# Altium PCB PCB1.PcbDoc
Units mil, origin at the board's own origin, x right, y up, seen from the top; angles counter-clockwise.
Board outline 6000 x 4000 mil, 2 copper layers (Top Layer, Bottom Layer); 94 components, 117 nets, 713 pads, 0 vias.
Unrouted connection lines stored in the file: 350.
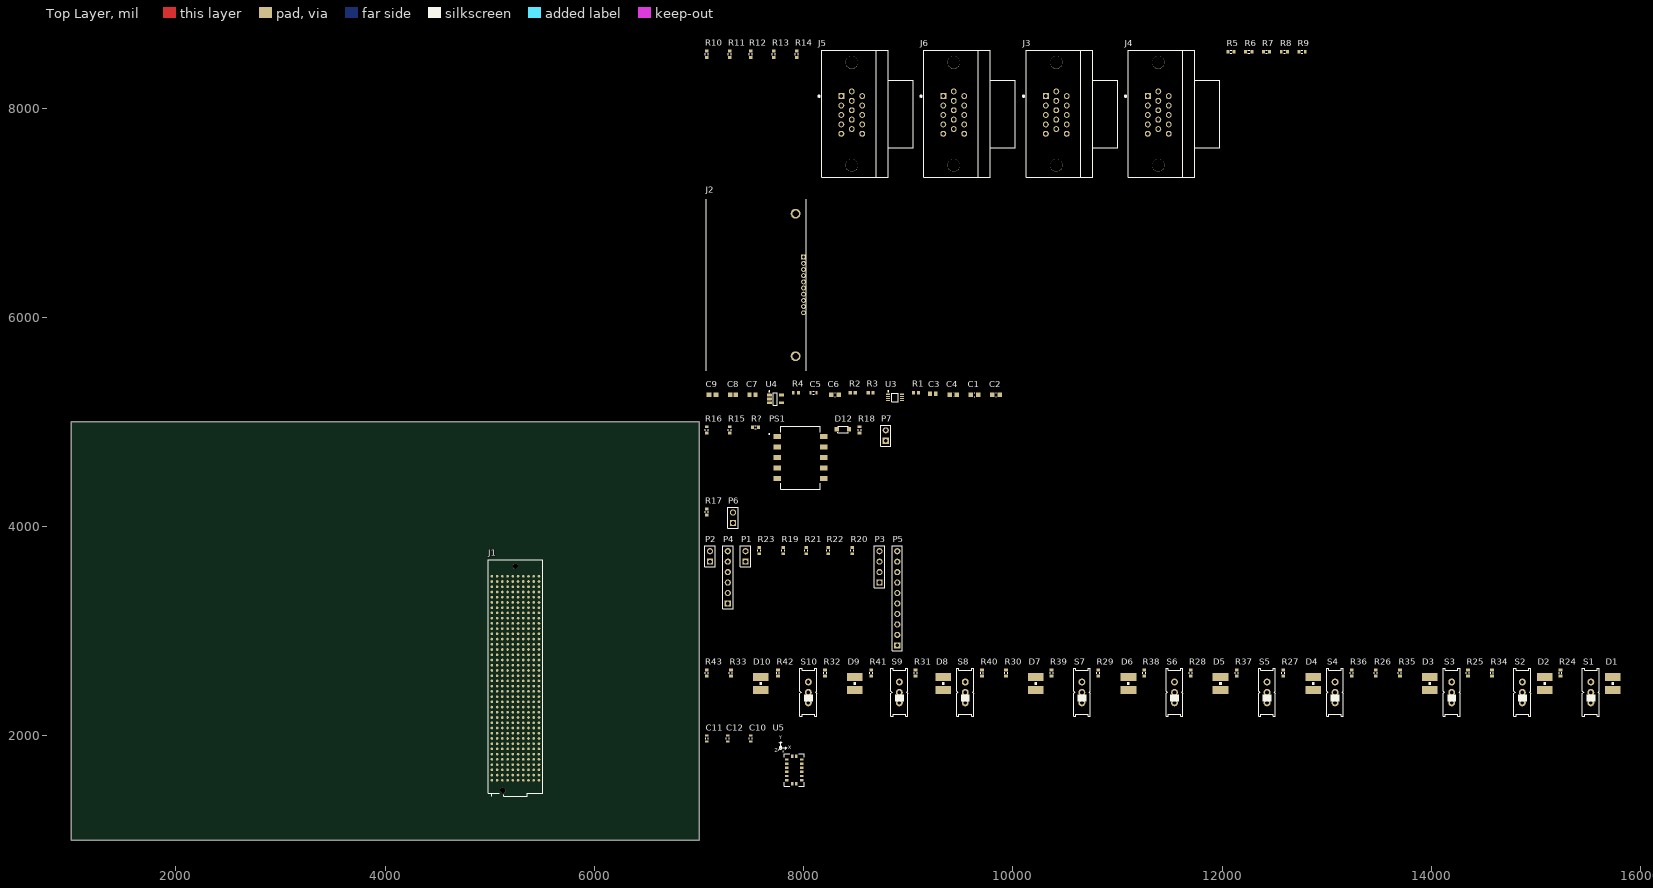
[diagram p0: Top Layer view]
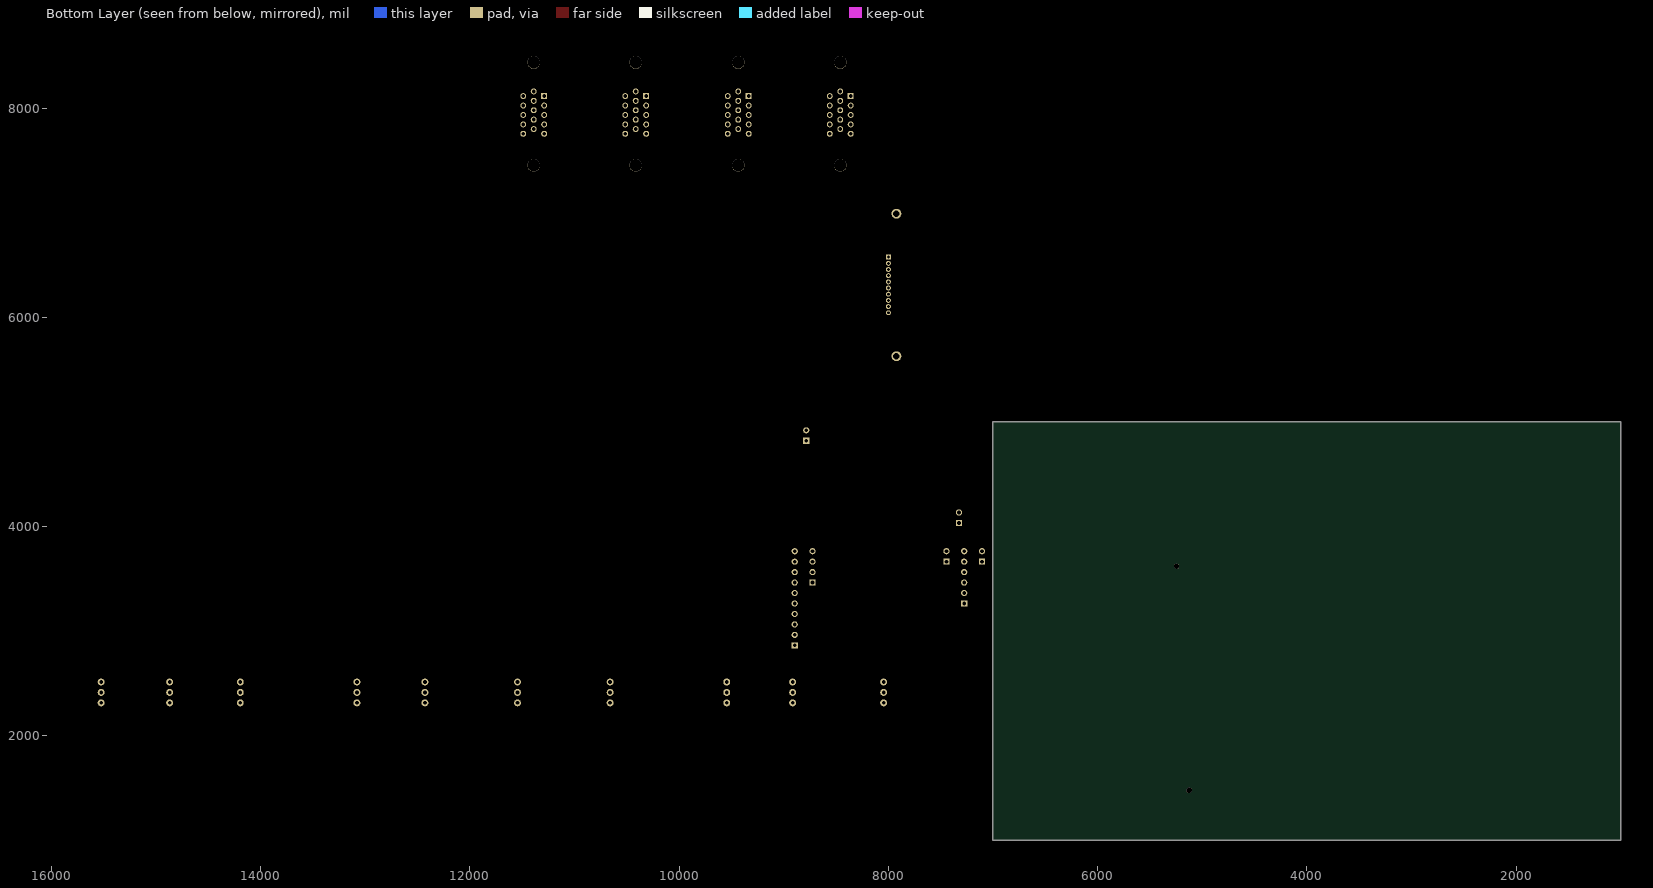
[diagram p1: Bottom Layer view, seen from below]

## Layer stack, top to bottom
Top Solder: solder mask 0.4, Solder Resist, Dk 3.5
Top Layer: signal copper 1.4
Dielectric 1: dielectric 12.6, FR-4, Dk 4.8
Bottom Layer: signal copper 1.4
Bottom Solder: solder mask 0.4, Solder Resist, Dk 3.5

## Board outline
1000,1000 7000,1000 7000,5000 1000,5000

## Design rules (kind name [scope] priority, off if disabled: settings)
Clearance [All] p1: gap=10 ignorepadtopadclearanceinfootprint=FALSE except(0: Arc-Hole Track-Hole SMDPad-Hole THPad-Hole Via-Hole Fill-Hole Poly-Hole Region-Hole Text-Hole)
PolygonConnect [All] p1: connectstyle=Relief reliefconductorwidth=10 reliefentries=4 polygonreliefangle="90 Angle" airgapwidth=10
RoutingVias [All] p1: holewidth=28 width=50 viastyle="Through Hole" minholewidth=28 minwidth=50 maxholewidth=28 maxwidth=50
SolderMaskExpansion [All] p1: expansion=4 istentingtop=FALSE
Width [All] p1: maxlimit=10 minlimit=10 preferedwidth=10
30 further rules are at their usual default settings.

## Components (designator, comment, footprint, x,y, rotation, side; value= is the part's Value field where it differs from the comment)
C1 "100nF 50V" CAPC0603(1608)100_M 9635,5260 r0 top value=100nF
C2 "100nF 50V" CAPC0603(1608)100_M 9840,5260 r0 top value=100nF
C3 "4.7uF" CAPC1608X87X35NL15T15 9235,5270 r0 top
C4 "100nF 50V" CAPC0603(1608)100_M 9430,5260 r0 top value=100nF
C5 "C1608X5R1A106K080AC" CAPC1608X90X20LL10 8095,5280 r0 top
C6 "100nF 50V" CAPC0603(1608)100_M 8300,5260 r0 top value=100nF
C7 "2.2uF 10V" CAPC1608X90X35ML10T15 7510,5260 r0 top
C8 "10nF 50V" CAPC1608X90X40ML10T20 7325,5260 r0 top
C9 "1uF 10V" CAPC1608X90X35ML15T15 7130,5260 r0 top
C10 "C1608X5R1A106K080AC" CAPC1608X90X20LL10 7495,1975 r90 top
C11 "C1608X5R1A106K080AC" CAPC1608X90X20LL10 7075,1975 r90 top
C12 "C1608X5R1A106K080AC" CAPC1608X90X20LL10 7275,1975 r90 top
D1 "LP T67F-P1R2-35-1-20-R18-Z" "LP T67F-P1R2-35-1-20-R18-Z" 15735,2500 r0 top
D2 "LP T67F-P1R2-35-1-20-R18-Z" "LP T67F-P1R2-35-1-20-R18-Z" 15085,2500 r0 top
D3 "LP T67F-P1R2-35-1-20-R18-Z" "LP T67F-P1R2-35-1-20-R18-Z" 13985,2500 r0 top
D4 "LP T67F-P1R2-35-1-20-R18-Z" "LP T67F-P1R2-35-1-20-R18-Z" 12870,2500 r0 top
D5 "LP T67F-P1R2-35-1-20-R18-Z" "LP T67F-P1R2-35-1-20-R18-Z" 11985,2500 r0 top
D6 "LP T67F-P1R2-35-1-20-R18-Z" "LP T67F-P1R2-35-1-20-R18-Z" 11105,2500 r0 top
D7 "LP T67F-P1R2-35-1-20-R18-Z" "LP T67F-P1R2-35-1-20-R18-Z" 10220,2500 r0 top
D8 "LP T67F-P1R2-35-1-20-R18-Z" "LP T67F-P1R2-35-1-20-R18-Z" 9335,2500 r0 top
D9 "LP T67F-P1R2-35-1-20-R18-Z" "LP T67F-P1R2-35-1-20-R18-Z" 8490,2500 r0 top
D10 "LP T67F-P1R2-35-1-20-R18-Z" "LP T67F-P1R2-35-1-20-R18-Z" 7590,2500 r0 top
D12 "RB161M-20TR" *SODFL260X160X90L70X90N 8375,4930 r0 top
J1 "ASP-134486-01" SAMTEC_ASP-134486-01_ASP-134486-01(Primary) 5245,2550 r90 top
J2 "NHD-C0216CZ-FSW-FBW-3V3" *LCD_NHD-C0216CZ-FSW-FBW-3V3_NHD-C0216CZ-FSW-FBW-3V3(Primary) 8000,6310 r90 top
J3 "181-015-213R561" *NORCOMP_181-015-213R561 10415,7945 r90 top
J4 "181-015-213R561" *NORCOMP_181-015-213R561 11390,7945 r90 top
J5 "181-015-213R561" *NORCOMP_181-015-213R561 8460,7945 r90 top
J6 "181-015-213R561" *NORCOMP_181-015-213R561 9435,7945 r90 top
P1 "I2C_headers" HDR1X2 7445,3665 r90 top
P2 "I2C_headers" HDR1X2 7105,3665 r90 top
P3 "SPI_headers" HDR1X4 8725,3465 r90 top
P4 "UART" HDR1X6 7275,3265 r90 top
P5 "GPIO_headers" HDR1X10 8895,2865 r90 top
P6 "12v_Ref" HDR1X2 7325,4035 r90 top
P7 "5v_ref" HDR1X2 8785,4820 r90 top
PS1 "R-78AA5.0-1.0SMD-R" *CONV_R-78AA5.0-1.0SMD-R 7970,4660 r0 top
R1 "200k" RESC1608X55X30LL15T15 9075,5280 r0 top
R2 "1k" RESC1608X55X30LL20T20 8470,5280 r0 top
R3 "1k" RESC1608X55X30LL20T20 8640,5280 r0 top
R4 "4.7k" RESC1608X55X30LL15T15 7925,5280 r0 top
R5 "Res3" J1-0603 12085,8540 r0 top value=10K
R6 "Res3" J1-0603 12255,8540 r0 top value=10K
R7 "Res3" J1-0603 12425,8540 r0 top value=10K
R8 "Res3" J1-0603 12595,8540 r0 top value=10K
R9 "Res3" J1-0603 12765,8540 r0 top value=10K
R10 "Res3" J1-0603 7075,8515 r90 top value=10K
R11 "Res3" J1-0603 7295,8515 r90 top value=10K
R12 "Res3" J1-0603 7495,8515 r90 top value=10K
R13 "Res3" J1-0603 7715,8515 r90 top value=10K
R14 "Res3" J1-0603 7935,8515 r90 top value=10K
R15 "Res3" J1-0603 7295,4925 r90 top value=46.7K
R16 "Res3" J1-0603 7075,4925 r90 top value=0
R17 "Res3" J1-0603 7075,4140 r90 top value=46.7K
R18 "Res3" J1-0603 8535,4925 r90 top value=1M
R19 "Res3" J1-0603 7805,3770 r90 top value=10K
R20 "Res3" J1-0603 8465,3770 r90 top value=10K
R21 "Res3" J1-0603 8025,3770 r90 top value=10K
R22 "Res3" J1-0603 8235,3770 r90 top value=10K
R23 "Res3" J1-0603 7575,3770 r90 top value=10K
R24 "Res3" J1-0603 15235,2600 r90 top value=220
R25 "Res3" J1-0603 14350,2600 r90 top value=220
R26 "Res3" J1-0603 13470,2600 r90 top value=220
R27 "Res3" J1-0603 12585,2600 r90 top value=220
R28 "Res3" J1-0603 11700,2600 r90 top value=220
R29 "Res3" J1-0603 10815,2600 r90 top value=220
R30 "Res3" J1-0603 9935,2600 r90 top value=220
R31 "Res3" J1-0603 9070,2600 r90 top value=220
R32 "Res3" J1-0603 8205,2600 r90 top value=220
R33 "Res3" J1-0603 7305,2600 r90 top value=220
R34 "Res3" J1-0603 14580,2600 r90 top value=10K
R35 "Res3" J1-0603 13700,2600 r90 top value=10K
R36 "Res3" J1-0603 13240,2600 r90 top value=10K
R37 "Res3" J1-0603 12140,2600 r90 top value=10K
R38 "Res3" J1-0603 11255,2600 r90 top value=10K
R39 "Res3" J1-0603 10370,2600 r90 top value=10K
R40 "Res3" J1-0603 9705,2600 r90 top value=10K
R41 "Res3" J1-0603 8645,2600 r90 top value=10K
R42 "Res3" J1-0603 7755,2600 r90 top value=10K
R43 "Res3" J1-0603 7075,2600 r90 top value=10K
R? "Res3" J1-0603 7540,4950 r0 top value=10k
S1 "EG1218" *EG1218_EG1218(Primary) 15525,2415 r90 top
S2 "EG1218" *EG1218_EG1218(Primary) 14870,2415 r90 top
S3 "EG1218" *EG1218_EG1218(Primary) 14195,2415 r90 top
S4 "EG1218" *EG1218_EG1218(Primary) 13080,2415 r90 top
S5 "EG1218" *EG1218_EG1218(Primary) 12430,2415 r90 top
S6 "EG1218" *EG1218_EG1218(Primary) 11545,2415 r90 top
S7 "EG1218" *EG1218_EG1218(Primary) 10660,2415 r90 top
S8 "EG1218" *EG1218_EG1218(Primary) 9545,2415 r90 top
S9 "EG1218" *EG1218_EG1218(Primary) 8915,2415 r90 top
S10 "EG1218" *EG1218_EG1218(Primary) 8045,2415 r90 top
U3 "PCA9306DCUR" DCU0008A_M 8875,5235 r0 top
U4 "LP2985-18DBVR" DBV0005A_M 7730,5220 r0 top
U5 "LIS3LV02DLTR" LGA-16_4P4X7P5X1 7910,1675 r0 top

## Footprints (in the part's own frame and the unit in brackets; to place one, negate y for a bottom-side part, rotate by r counter-clockwise, add the part's x,y. Pads: shape width x height; smd on the part's side, far side on the other; paste and mask are expansions set on the pad)
*CONV_R-78AA5.0-1.0SMD-R [mm]
  rect 1.8x1.2 smd: 1(-5.6,5.08) 2(-5.6,2.54) 3(-5.6,0) 4(-5.6,-2.54) 5(-5.6,-5.08) 6(5.6,-5.08) 7(5.6,-2.54) 8(5.6,0) 9(5.6,2.54) 10(5.6,5.08)
  silkscreen extent -7.72,-7.68 4.8,7.62
*EG1218_EG1218(Primary) [mil]
  round 66 hole 35.43: O(-100,0) P(0,0) S(100,0)
  silkscreen extent -230,-80 230,80
*LCD_NHD-C0216CZ-FSW-FBW-3V3_NHD-C0216CZ-FSW-FBW-3V3(Primary) [mm]
  rect 1.208x1.208 hole 0.7: 1(6.75,0)
  round 1.208 hole 0.7: 2(5.25,0) 3(3.75,0) 4(2.25,0) 5(0.75,0) 6(-0.75,0) 7(-2.25,0) 8(-3.75,0) 9(-5.25,0) 10(-6.75,0)
  round 2.4 hole 1.6: A(-17.3,1.95) K(17.3,1.95)
  silkscreen extent -20.85,-0.6 20.85,23.7, body extent -20.7,-0.71 20.7,23.59, height 4.1
*NORCOMP_181-015-213R561 [mil]
  rect 57x57 hole 37: 1(170,100)
  round 57 hole 37: 2(80,100) 3(-10,100) 4(-100,100) 5(-190,100) 6(215,0) 7(125,0) 8(35,0) 9(-55,0) 10(-145,0) 11(170,-100) 12(80,-100) 13(-10,-100) 14(-100,-100) 15(-190,-100)
  round 120 hole 120 unplated: None(-492,0) None(492,0)
  silkscreen extent -606,-587 606,321
*SODFL260X160X90L70X90N [mm]
  rect 1.07x1.03 smd: 1(-1.485,0) 2(1.485,0)
  silkscreen extent -1.3,-0.8 1.3,0.8
CAPC0603(1608)100_M [mm] "Chip Capacitor, Body 1.6x0.8mm, Height 1.0mm, IPC Low Density"
  rect 1.1x1.1 smd: 1(-0.9,0) 2(0.9,0)
  silkscreen extent -0.05,-0.45 0.05,0.45, body extent -0.87,-0.47 0.88,0.48, height 1
CAPC1608X87X35NL15T15 [mm] "Chip Capacitor, 2-Leads, Body 1.60x0.80mm, IPC Medium Density"
  rect 0.9x1 smd: 1(-0.675,0) 2(0.675,0)
  body extent -0.87,-0.48 0.87,0.47, height 0.87
CAPC1608X90X20LL10 [mm]
  rect 0.45x0.85 smd: 1(-0.75,0) 2(0.75,0)
  silkscreen extent -0.15,-0.33 0.15,0.33, body extent -0.85,-0.45 0.85,0.45, height 0.9
CAPC1608X90X35ML10T15 [mm] "Chip Capacitor, 2-Leads, Body 1.60x0.80mm, IPC Low Density"
  rect 0.95x1.05 smd: 1(-0.725,0) 2(0.725,0)
  body extent -0.85,-0.45 0.85,0.45, height 0.9
CAPC1608X90X35ML15T15 [mm] "Chip Capacitor, 2-Leads, Body 1.60x0.81mm, IPC Low Density"
  rect 1.25x1.1 smd: 1(-0.85,0) 2(0.85,0)
  body extent -0.88,-0.48 0.87,0.48, height 0.9
CAPC1608X90X40ML10T20 [mm] "Chip Capacitor, 2-Leads, Body 1.7x0.9mm, IPC Low Density"
  rect 1.05x1.05 smd: 1(-0.675,0) 2(0.675,0)
  body extent -0.85,-0.45 0.85,0.45, height 0.9
DBV0005A_M [mm] "SOT23, 5-Leads, Body 3.05x1.75mm, Pitch 0.95mm, IPC Low Density"
  rrect15% 1.2x0.65 smd: 1(-1.475,0.95) 2(-1.475,0) 3(-1.475,-0.95) 4(1.475,-0.95) 5(1.475,0.95)
  silkscreen extent -1.6,-1.55 0.5,1.95, body extent -1.42,-1.46 1.42,1.46, height 1.08
DCU0008A_M [mm] "SOP, 8-Leads, Body 2.4x2.1mm, Pitch 0.5mm, IPC Low Density"
  rrect33% 1x0.3 smd: 1(-1.7,0.75) 2(-1.7,0.25) 3(-1.7,-0.25) 4(-1.7,-0.75) 5(1.7,-0.75) 6(1.7,-0.25) 7(1.7,0.25) 8(1.7,0.75)
  silkscreen extent -1.82,-1.05 0.8,1.6, body extent -1.56,-1 1.56,1, height 0.9
HDR1X2 [mm] "Connector; Header; 2 Position"
  rect 1.5x1.5 hole 0.9: 1(0,0)
  round 1.5 hole 0.9: 2(2.54,0)
  silkscreen extent -1.27,-1.27 3.81,1.27
HDR1X4 [mm] "Connector; Header; 4 Position"
  rect 1.5x1.5 hole 0.9: 1(0,0)
  round 1.5 hole 0.9: 2(2.54,0) 3(5.08,0) 4(7.62,0)
  silkscreen extent -1.27,-1.27 8.89,1.27
HDR1X6 [mm] "Connector; Header; 6 Position"
  rect 1.5x1.5 hole 0.9: 1(0,0)
  round 1.5 hole 0.9: 2(2.54,0) 3(5.08,0) 4(7.62,0) 5(10.16,0) 6(12.7,0)
  silkscreen extent -1.27,-1.27 13.97,1.27
HDR1X10 [mm] "Connector; Header; 10 Position"
  rect 1.5x1.5 hole 0.9: 1(0,0)
  round 1.5 hole 0.9: 2(2.54,0) 3(5.08,0) 4(7.62,0) 5(10.16,0) 6(12.7,0) 7(15.24,0) 8(17.78,0) 9(20.32,0) 10(22.86,0)
  silkscreen extent -1.27,-1.27 24.13,1.27
J1-0603 [mm] "Chip Resistor, Body 1.6x0.8mm, IPC High Density"
  rect 0.7x0.9 smd: 1(-0.75,0) 2(0.75,0)
  silkscreen extent -0.2,-0.35 0.2,0.35, body extent -0.85,-0.48 0.85,0.48, height 0.9
LGA-16_4P4X7P5X1 [mil]
  rect 34x22 smd: 1(-70.5,98.43) 2(-70.5,59.06) 3(-70.5,19.68) 4(-70.5,-19.68) 5(-70.5,-59.06) 6(-70.5,-98.43) 9(70.5,-98.43) 10(70.5,-59.06) 11(70.5,-19.68) 12(70.5,19.68) 13(70.5,59.06) 14(70.5,98.43)
  rect 22x34 smd: 7(-19.69,-131.5) 8(19.69,-131.5) 15(19.69,131.5) 16(-19.69,131.5)
  silkscreen extent -154,-156 94,304, body extent -89,-151 89,151, height 39
"LP T67F-P1R2-35-1-20-R18-Z" [mil]
  rect 150x76 smd: A(0,63) K(0,-63)
  silkscreen extent -10,-10 10,10
RESC1608X55X30LL15T15 [mm] "Chip Resistor, 2-Leads, Body 1.60x0.80mm, IPC High Density"
  rect 0.7x0.85 smd: 1(-0.625,0) 2(0.625,0)
  body extent -0.87,-0.48 0.87,0.48, height 0.55
RESC1608X55X30LL20T20 [mm] "Chip Resistor, 2-Leads, Body 1.60x0.80mm, IPC High Density"
  rect 0.8x0.9 smd: 1(-0.6,0) 2(0.6,0)
  body extent -0.9,-0.5 0.9,0.5, height 0.55
SAMTEC_ASP-134486-01_ASP-134486-01(Primary) [mm]
  round 0.64 smd: A1(-24.765,5.715) A2(-23.495,5.715) A3(-22.225,5.715) A4(-20.955,5.715) A5(-19.685,5.715) A6(-18.415,5.715) A7(-17.145,5.715) A8(-15.875,5.715) A9(-14.605,5.715) A10(-13.335,5.715) A11(-12.065,5.715) A12(-10.795,5.715) A13(-9.525,5.715) A14(-8.255,5.715) A15(-6.985,5.715) A16(-5.715,5.715) A17(-4.445,5.715) A18(-3.175,5.715) A19(-1.905,5.715) A20(-0.635,5.715) A21(0.635,5.715) A22(1.905,5.715) A23(3.175,5.715) A24(4.445,5.715) A25(5.715,5.715) A26(6.985,5.715) A27(8.255,5.715) A28(9.525,5.715) A29(10.795,5.715) A30(12.065,5.715) A31(13.335,5.715) A32(14.605,5.715) A33(15.875,5.715) A34(17.145,5.715) A35(18.415,5.715) A36(19.685,5.715) A37(20.955,5.715) A38(22.225,5.715) A39(23.495,5.715) A40(24.765,5.715) B1(-24.765,4.445) B2(-23.495,4.445) B3(-22.225,4.445) B4(-20.955,4.445) B5(-19.685,4.445) B6(-18.415,4.445) B7(-17.145,4.445) B8(-15.875,4.445) B9(-14.605,4.445) B10(-13.335,4.445) B11(-12.065,4.445) B12(-10.795,4.445) B13(-9.525,4.445) B14(-8.255,4.445) B15(-6.985,4.445) B16(-5.715,4.445) B17(-4.445,4.445) B18(-3.175,4.445) B19(-1.905,4.445) B20(-0.635,4.445) B21(0.635,4.445) B22(1.905,4.445) B23(3.175,4.445) B24(4.445,4.445) B25(5.715,4.445) B26(6.985,4.445) B27(8.255,4.445) B28(9.525,4.445) B29(10.795,4.445) B30(12.065,4.445) B31(13.335,4.445) B32(14.605,4.445) B33(15.875,4.445) B34(17.145,4.445) B35(18.415,4.445) B36(19.685,4.445) B37(20.955,4.445) B38(22.225,4.445) B39(23.495,4.445) B40(24.765,4.445) C1(-24.765,3.175) C2(-23.495,3.175) C3(-22.225,3.175) C4(-20.955,3.175) C5(-19.685,3.175) C6(-18.415,3.175) C7(-17.145,3.175) C8(-15.875,3.175) C9(-14.605,3.175) C10(-13.335,3.175) C11(-12.065,3.175) C12(-10.795,3.175) C13(-9.525,3.175) C14(-8.255,3.175) C15(-6.985,3.175) C16(-5.715,3.175) C17(-4.445,3.175) C18(-3.175,3.175) C19(-1.905,3.175) C20(-0.635,3.175) C21(0.635,3.175) C22(1.905,3.175) C23(3.175,3.175) C24(4.445,3.175) C25(5.715,3.175) C26(6.985,3.175) C27(8.255,3.175) C28(9.525,3.175) C29(10.795,3.175) C30(12.065,3.175) C31(13.335,3.175) C32(14.605,3.175) C33(15.875,3.175) C34(17.145,3.175) C35(18.415,3.175) C36(19.685,3.175) C37(20.955,3.175) C38(22.225,3.175) C39(23.495,3.175) C40(24.765,3.175) D1(-24.765,1.905) D2(-23.495,1.905) D3(-22.225,1.905) D4(-20.955,1.905) D5(-19.685,1.905) D6(-18.415,1.905) D7(-17.145,1.905) D8(-15.875,1.905) D9(-14.605,1.905) D10(-13.335,1.905) D11(-12.065,1.905) D12(-10.795,1.905) D13(-9.525,1.905) D14(-8.255,1.905) D15(-6.985,1.905) D16(-5.715,1.905) D17(-4.445,1.905) D18(-3.175,1.905) D19(-1.905,1.905) D20(-0.635,1.905) D21(0.635,1.905) D22(1.905,1.905) D23(3.175,1.905) D24(4.445,1.905) D25(5.715,1.905) D26(6.985,1.905) D27(8.255,1.905) D28(9.525,1.905) D29(10.795,1.905) D30(12.065,1.905) D31(13.335,1.905) D32(14.605,1.905) D33(15.875,1.905) D34(17.145,1.905) D35(18.415,1.905) D36(19.685,1.905) D37(20.955,1.905) D38(22.225,1.905) D39(23.495,1.905) D40(24.765,1.905) E1(-24.765,0.635) E2(-23.495,0.635) E3(-22.225,0.635) E4(-20.955,0.635) E5(-19.685,0.635) E6(-18.415,0.635) E7(-17.145,0.635) E8(-15.875,0.635) E9(-14.605,0.635) E10(-13.335,0.635) E11(-12.065,0.635) E12(-10.795,0.635) E13(-9.525,0.635) E14(-8.255,0.635) E15(-6.985,0.635) E16(-5.715,0.635) E17(-4.445,0.635) E18(-3.175,0.635) E19(-1.905,0.635) E20(-0.635,0.635) E21(0.635,0.635) E22(1.905,0.635) E23(3.175,0.635) E24(4.445,0.635) E25(5.715,0.635) E26(6.985,0.635) E27(8.255,0.635) E28(9.525,0.635) E29(10.795,0.635) E30(12.065,0.635) E31(13.335,0.635) E32(14.605,0.635) E33(15.875,0.635) E34(17.145,0.635) E35(18.415,0.635) E36(19.685,0.635) E37(20.955,0.635) E38(22.225,0.635) E39(23.495,0.635) E40(24.765,0.635) F1(-24.765,-0.635) F2(-23.495,-0.635) F3(-22.225,-0.635) F4(-20.955,-0.635) F5(-19.685,-0.635) F6(-18.415,-0.635) F7(-17.145,-0.635) F8(-15.875,-0.635) F9(-14.605,-0.635) F10(-13.335,-0.635) F11(-12.065,-0.635) F12(-10.795,-0.635) F13(-9.525,-0.635) F14(-8.255,-0.635) F15(-6.985,-0.635) F16(-5.715,-0.635) F17(-4.445,-0.635) F18(-3.175,-0.635) F19(-1.905,-0.635) F20(-0.635,-0.635) F21(0.635,-0.635) F22(1.905,-0.635) F23(3.175,-0.635) F24(4.445,-0.635) F25(5.715,-0.635) F26(6.985,-0.635) F27(8.255,-0.635) F28(9.525,-0.635) F29(10.795,-0.635) F30(12.065,-0.635) F31(13.335,-0.635) F32(14.605,-0.635) F33(15.875,-0.635) F34(17.145,-0.635) F35(18.415,-0.635) F36(19.685,-0.635) F37(20.955,-0.635) F38(22.225,-0.635) F39(23.495,-0.635) F40(24.765,-0.635) G1(-24.765,-1.905) G2(-23.495,-1.905) G3(-22.225,-1.905) G4(-20.955,-1.905) G5(-19.685,-1.905) G6(-18.415,-1.905) G7(-17.145,-1.905) G8(-15.875,-1.905) G9(-14.605,-1.905) G10(-13.335,-1.905) G11(-12.065,-1.905) G12(-10.795,-1.905) G13(-9.525,-1.905) G14(-8.255,-1.905) G15(-6.985,-1.905) G16(-5.715,-1.905) G17(-4.445,-1.905) G18(-3.175,-1.905) G19(-1.905,-1.905) G20(-0.635,-1.905) G21(0.635,-1.905) G22(1.905,-1.905) G23(3.175,-1.905) G24(4.445,-1.905) G25(5.715,-1.905) G26(6.985,-1.905) G27(8.255,-1.905) G28(9.525,-1.905) G29(10.795,-1.905) G30(12.065,-1.905) G31(13.335,-1.905) G32(14.605,-1.905) G33(15.875,-1.905) G34(17.145,-1.905) G35(18.415,-1.905) G36(19.685,-1.905) G37(20.955,-1.905) G38(22.225,-1.905) G39(23.495,-1.905) G40(24.765,-1.905) H1(-24.765,-3.175) H2(-23.495,-3.175) H3(-22.225,-3.175) H4(-20.955,-3.175) H5(-19.685,-3.175) H6(-18.415,-3.175) H7(-17.145,-3.175) H8(-15.875,-3.175) H9(-14.605,-3.175) H10(-13.335,-3.175) H11(-12.065,-3.175) H12(-10.795,-3.175) H13(-9.525,-3.175) H14(-8.255,-3.175) H15(-6.985,-3.175) H16(-5.715,-3.175) H17(-4.445,-3.175) H18(-3.175,-3.175) H19(-1.905,-3.175) H20(-0.635,-3.175) H21(0.635,-3.175) H22(1.905,-3.175) H23(3.175,-3.175) H24(4.445,-3.175) H25(5.715,-3.175) H26(6.985,-3.175) H27(8.255,-3.175) H28(9.525,-3.175) H29(10.795,-3.175) H30(12.065,-3.175) H31(13.335,-3.175) H32(14.605,-3.175) H33(15.875,-3.175) H34(17.145,-3.175) H35(18.415,-3.175) H36(19.685,-3.175) H37(20.955,-3.175) H38(22.225,-3.175) H39(23.495,-3.175) H40(24.765,-3.175) J1(-24.765,-4.445) J2(-23.495,-4.445) J3(-22.225,-4.445) J4(-20.955,-4.445) J5(-19.685,-4.445) J6(-18.415,-4.445) J7(-17.145,-4.445) J8(-15.875,-4.445) J9(-14.605,-4.445) J10(-13.335,-4.445) J11(-12.065,-4.445) J12(-10.795,-4.445) J13(-9.525,-4.445) J14(-8.255,-4.445) J15(-6.985,-4.445) J16(-5.715,-4.445) J17(-4.445,-4.445) J18(-3.175,-4.445) J19(-1.905,-4.445) J20(-0.635,-4.445) J21(0.635,-4.445) J22(1.905,-4.445) J23(3.175,-4.445) J24(4.445,-4.445) J25(5.715,-4.445) J26(6.985,-4.445) J27(8.255,-4.445) J28(9.525,-4.445) J29(10.795,-4.445) J30(12.065,-4.445) J31(13.335,-4.445) J32(14.605,-4.445) J33(15.875,-4.445) J34(17.145,-4.445) J35(18.415,-4.445) J36(19.685,-4.445) J37(20.955,-4.445) J38(22.225,-4.445) J39(23.495,-4.445) J40(24.765,-4.445) K1(-24.765,-5.715) K2(-23.495,-5.715) K3(-22.225,-5.715) K4(-20.955,-5.715) K5(-19.685,-5.715) K6(-18.415,-5.715) K7(-17.145,-5.715) K8(-15.875,-5.715) K9(-14.605,-5.715) K10(-13.335,-5.715) K11(-12.065,-5.715) K12(-10.795,-5.715) K13(-9.525,-5.715) K14(-8.255,-5.715) K15(-6.985,-5.715) K16(-5.715,-5.715) K17(-4.445,-5.715) K18(-3.175,-5.715) K19(-1.905,-5.715) K20(-0.635,-5.715) K21(0.635,-5.715) K22(1.905,-5.715) K23(3.175,-5.715) K24(4.445,-5.715) K25(5.715,-5.715) K26(6.985,-5.715) K27(8.255,-5.715) K28(9.525,-5.715) K29(10.795,-5.715) K30(12.065,-5.715) K31(13.335,-5.715) K32(14.605,-5.715) K33(15.875,-5.715) K34(17.145,-5.715) K35(18.415,-5.715) K36(19.685,-5.715) K37(20.955,-5.715) K38(22.225,-5.715) K39(23.495,-5.715) K40(24.765,-5.715)
  round 1.27 hole 1.27 unplated: None(-27.189,3.05) None(27.191,0)
  silkscreen extent -28.66,-6.62 28.76,6.62

## Part data
C1 C2 C4 C6: library part CMP-1035-02594-1, "CAP 100nF 50V -20% to +80% 0603 (1608 Metric) Thickness 1mm SMD", Case-EIA=0603, Case-Metric=1608, Rated Voltage="50 V", Tolerance="-20% to +80%", Max Thickness="1 mm", Technology=SMT
C3: library part CMP-2006-03238-1, Manufacturer=Kemet, Part Number=C0603C475K8PACTU
C5 C10 C11 C12: library part CMP-2000-04979-1, "Chip Capacitor, 10 uF, +/- 10%, 10 V, -55 to 85 degC, 0603 (1608 Metric), RoHS, Tape and Reel", Capacitance=10µF, Manufacturer=TDK, Operating Temperature=-55degC~85degC, Package / Case=0603(1608Metric), Package Description="2-Pin Surface Mount Device, Body 1.6 x 0.8 mm", Package Reference=603, PCN Part Number=MLCCPartNumberChange30/Nov/2012, Ratings=-, Standard Package=1, Temperature Coefficient=X5R, Tolerance=±10%, Voltage - Rated=10V, Applications=GeneralPurpose, Category=Capacitors, Datasheet URL=http://download.siliconexpert.com/pdfs/2015/4/21/15/54/45/779/tdk_/manual/37024850441143360mlcc_commercial_general_en.pdf, Datasheet Version=Mar-15, Design Resources=20WNon-IsolatedBuckLEDDriverUsingPLLNK460KG, Family=CeramicCapacitors, Features=-, Height - Seated (Max)=-, Kits=445-9003-KIT-ND-KITCAPCERHICAPMLCCSMD, Lead Spacing=-, Lead Style=-, Manufacturer Part Number=C1608X5R1A106K080AC, Manufacturer URL=http://www.tdk.com/, Mounting Type=SurfaceMount,MLCC, Online Catalog=CSeries,GeneralPurpose, Other Names=445-7486-1, Packaging=CutTape(CT), Product Training Modules=CSeriesGeneralApplicationsSEAT,CCV,andTVCLDesignToolsGuidetoReplacinganElectrolyticCapacitorwithanMLCC, RoHS Information=RoHSCertificate-MLCC, Series=C, Size / Dimension="0.063\"Lx0.031\"W(1.60mmx0.80mm)", Thickness (Max)="0.035\"(0.90mm)"
C7: library part CMP-2006-02836-1, Manufacturer=Murata, Part Number=GRM188R71A225KE15D
C8: library part CMP-2100-03600-1, "Chip Capacitor, 10 nF, +/- 10%, 50 V, -55 to 125 degC, 0603 (1608 Metric), RoHS, Tape and Reel", Capacitance=10nF, Case Code (Imperial)=0603, Case Code (Metric)=1608, Dielectric=X7R, Insulation Resistance=100GR, Manufacturer=Yageo, Max Operating Temperature=125degC, Min Operating Temperature=-55degC, Package Description="2-Pin Surface Mount Device, Body 1.6 x 0.8 mm", Package Quantity=1, Tolerance=10%, Voltage=50V, Case/Package=0603, Composition=Ceramic, Datasheet URL=http://www.yageo.com/documents/recent/UPY-GPHC_X7R_6.3V-to-50V_15.pdf, Datasheet Version="Rev. 15, 10/2016", Depth=0.8mm, Height=0.8mm, Lead Free=LeadFree, Length=1.6mm, Manufacturer URL=http://www.yageo.com/, Material=Ceramic, Mount=SurfaceMount, Number of Pins=2, Package Reference=0603, Packaging=TapeandReel, Radiation Hardening=No, REACH SVHC=NoSVHC, RoHSCompliant=True, Termination=SMD/SMT, Thickness=0.035inch, Voltage Rating=50V, Voltage Rating (DC)=50V, Width=0.031inch
C9: library part CMP-2006-02287-1, Manufacturer=Kemet, Part Number=C0603C105K8PAC7867
D1 D2 D3 D4 D5 D6 D7 D8 D9 D10: "SMD LED"
D12: "Diode Schottky 20V 1A Surface Mount PMDU", Package="SOD-123 Rohm", Digi-Key_Part_Number=RB161M-20CT-ND, Digi-Key_Purchase_URL=https://www.digikey.com/product-detail/en/rohm-semiconductor/RB161M-20TR/RB161M-20CT-ND/926506?utm_source=snapeda&utm_medium=aggregator&utm_campaign=symbol, MF=Rohm, MP=RB161M-20TR, SnapEDA_Link=https://www.snapeda.com/parts/RB161M-20TR/Rohm/view-part/804629/?ref=snap
J1: "400 Position Connector Array, Female Sockets Surface Mount Gold", Package=None, Digi-Key_Part_Number=SAM8728CT-ND, Digi-Key_Purchase_URL=https://www.digikey.com/product-detail/en/samtec-inc/ASP-134486-01/SAM8728CT-ND/2135095?utm_source=snapeda&utm_medium=aggregator&utm_campaign=symbol, MF="Samtec Inc.", MP=ASP-134486-01, SnapEDA_Link=https://www.snapeda.com/parts/ASP-134486-01/Samtec%20Inc./view-part/898249/?ref=snap
J2: "Character LCD Display Module Transflective 5 x 8 Dots FSTN - Film Super-Twisted Nematic LED - White Serial 41.40mm x 24.30mm x 4.00mm", Package=None, Digi-Key_Part_Number=NHD-C0216CZ-FSW-FBW-3V3-ND, Digi-Key_Purchase_URL=https://www.digikey.com/product-detail/en/newhaven-display-intl/NHD-C0216CZ-FSW-FBW-3V3/NHD-C0216CZ-FSW-FBW-3V3-ND/2059234?utm_source=snapeda&utm_medium=aggregator&utm_campaign=symbol, MF="Newhaven Display", MP=NHD-C0216CZ-FSW-FBW-3V3, SnapEDA_Link=https://www.snapeda.com/parts/NHD-C0216CZ-FSW-FBW-3V3/Newhaven%20Display%20Intl/view-part/217645/?ref=snap
J3 J4 J5 J6: "15 Position D-Sub, High Density Receptacle, Female Sockets Connector", Package=None, Availability=Unavailable, MF="NorComp Inc.", MP=181-015-213R561, Price=None, SnapEDA_Link=https://www.snapeda.com/parts/181-015-213R561/NorComp%20Inc./view-part/560830/?ref=snap
P1 P2 P6 P7: library part "Header 2", "Header, 2-Pin", LatestRevisionDate=17-Jul-2002, LatestRevisionNote="Re-released for DXP Platform.", Publisher="Altium Limited"
P3: library part "Header 4", "Header, 4-Pin", LatestRevisionDate=17-Jul-2002, LatestRevisionNote="Re-released for DXP Platform.", Publisher="Altium Limited"
P4: library part "Header 6", "Header, 6-Pin", LatestRevisionDate=17-Jul-2002, LatestRevisionNote="Re-released for DXP Platform.", Publisher="Altium Limited"
P5: library part "Header 10", "Header, 10-Pin", LatestRevisionDate=17-Jul-2002, LatestRevisionNote="Re-released for DXP Platform.", Publisher="Altium Limited"
PS1: "1A DC/DC-Converter 'INNOLINE' SMD reg", Package="SMD-10 Recom Power", Availability=Unavailable, MF="Recom Power", MP=R-78AA5.0-1.0SMD-R, Price=None, SnapEDA_Link=https://www.snapeda.com/parts/R-78AA5.0-1.0SMD-R/Recom%20Power/view-part/480105/?ref=snap
R1: library part CMP-2000-00743-1, Manufacturer=Panasonic, Part Number=ERJ-3GEYJ204V
R2 R3: library part CMP-2000-00873-1, Manufacturer=Panasonic, Part Number=ERA3AEB102V
R4: library part CMP-2000-00522-1, Manufacturer=Panasonic, Part Number=ERJ3EKF4701V
R5 R6 R7 R8 R9 R10 R11 R12 R13 R14 R15 R16 R17 R18 R19 R20 R21 R22 R23 R24 R25 R26 R27 R28 R29 R30 R31 R32 R33 R34 R35 R36 R37 R38 R39 R40 R41 R42 R43 R?: "Resistor", LatestRevisionDate=29-May-2009, LatestRevisionNote="IPC-7351 Footprint Added.", PackageDescription="Chip Resistor", PackageReference=J1-0603, Published=8-Jun-2000, Publisher="Altium Limited"
S1 S2 S3 S4 S5 S6 S7 S8 S9 S10: "Slide Switch SPDT Through Hole", Package="FakePackage u", Digi-Key_Part_Number=EG1903-ND, Digi-Key_Purchase_URL=https://www.digikey.com/product-detail/en/e-switch/EG1218/EG1903-ND/101726?utm_source=snapeda&utm_medium=aggregator&utm_campaign=symbol, MF=E-Switch, MP=EG1218, SnapEDA_Link=https://www.snapeda.com/parts/EG1218/E-Switch/view-part/13895/?ref=snap
U3: library part CMP-0314-00419-2, "Dual Bi-Directional I2C-Bus and SMBus Voltage Level-Translator, 0 to 5.5 V, -40 to 85 degC, 8-pin US8 (DCU), Green (RoHS & no Sb/Br)", 5V Tolerant I/O=Yes, Manufacturer="Texas Instruments", Max Frequency(kHz)=400, On-Chip Power-on-Reset=No, Rating=Catalog, Code_JEDEC=MO-187-CA, ComponentLink1Description=Datasheet, ComponentLink1URL=http://www.ti.com/general/docs/lit/getliterature.tsp?genericPartNumber=PCA9306&fileType=pdf, ComponentLink2Description="Package Specification", ComponentLink2URL=http://www.ti.com/litv/pdf/mpds050d, DatasheetVersion=SCPS113J, Eco-Plan="Green (RoHS & no Sb/Br)", Enable Pin=Yes, fSCLK(Max)(MHz)=400, Function="Voltage Translator", Mounting Technology="Surface Mount", No. of Outputs=2, Open Drain I/O Type=Yes, PackageDescription="8-Pin Thin Shrink Small Outline Package 0.5 mm Pitch", PackageReference=DCU0008A, PackageVersion="revF, Jul-2005", PartNumber=PCA9306DCUR, SubFamily="I2C Special Function", tpd max(ns)=1.5, Vcc range(V)="0 to 5.5"
U4: library part CMP-0758-00065-2, "Single Output Low Noise LDO, 150 mA, Fixed 1.8 V Output, 1.5% Tolerance, 2.2 to 16 V Input, Low IQ, 5-Pin SOT-23 (DBV), -40 to 125 degC, Green (RoHS & no Sb/Br), Tape and Reel", Manufacturer="Texas Instruments", Operating Temperature Range (degC)="-40 to 125", Accuracy (%)=1.5, ComponentLink1Description="Manufacturer URL", ComponentLink1URL=http://www.ti.com/, ComponentLink2Description=Datasheet, ComponentLink2URL=http://www.ti.com/lit/ds/symlink/lp2985-50.pdf, ComponentLink3Description="Package Specification", ComponentLink3URL=http://www.ti.com/litv/pdf/mpds018j, DatasheetVersion=SLVS522N, Fixed Output Options (V)=1.8, Iout (Max) (A)=0.15, Iq (Typ) (mA)=0.85, Mounting Technology="Surface Mount", Output Options="Fixed Output", PackageDescription="5-Pin Plastic Small Outline, Body 2.9 x 1.6 mm, Pitch 0.95 mm", PackageReference=DBV0005A, PackageVersion=4073253-4/L, Packing="Tape and Reel", PartNumber=LP2985-18DBVR, RoHS=TRUE, Vdo (Typ) (mV)=280, Vin (V)="2.2 to 16"
U5: "ACCELEROMETER 2-6G I2C/SPI 16LGA", Built_By=EMA_UL_Team, C="Copyright (C) 2015 Accelerated Designs. All rights reserved", Manufacturer_Part_Number=LIS3LV02DLTR, Vendor=STMicroelectronics

## Nets (pads, with @x,y where several pads share a name; then routed paths per layer and width w, separated by ;. In a path a pad name is that pad's centre, name@x,y a point inside that pad or via, vN(x,y) a via of type N, cw(c..) or ccw(c..) an arc to the next point about the centre after c; other vN are vias at no path point)
1.8v: C3.2 C4.2 C7.2 R2.2 R3.2 U3.2 U4.5
3.3v: C1.2 C2.2 C5.2 C6.2 C9.2 C10.2 C11.2 C12.2 J1.C39 J1.D32 J1.D36 J1.D38 J1.D40 J2.7 R1.2 R4.2 R5.2 R6.2 R7.2 R8.2 R9.2 R10.1 R11.1 R12.1 R13.1 R14.1 R19.2 R20.2 R21.2 R22.2 R23.2 R?.2 S1.P S2.P S3.P S4.P S5.P S6.P S7.P S8.P S9.P S10.P U4.1 U4.3 U5.4 U5.6 U5.11 U5.12 U5.13
5v: D12.1 R18.2
12v: J1.C35 J1.C37 PS1.1 PS1.2 R17.1
DGND: C1.1 C2.1 C3.1 C4.1 C5.1 C6.1 C7.1 C8.1 C9.1 C10.1 C11.1 C12.1 J1.A1 J1.A4 J1.A5 J1.A8 J1.A9 J1.A12 J1.A13 J1.A16 J1.A17 J1.A20 J1.A21 J1.A24 J1.A25 J1.A28 J1.A29 J1.A32 J1.A33 J1.A36 J1.A37 J1.A40 J1.B2 J1.B3 J1.B6 J1.B7 J1.B10 J1.B11 J1.B14 J1.B15 J1.B18 J1.B19 J1.B22 J1.B23 J1.B26 J1.B27 J1.B30 J1.B31 J1.B34 J1.B35 J1.B38 J1.B39 J1.C1 J1.C4 J1.C5 J1.C8 J1.C9 J1.C12 J1.C13 J1.C16 J1.C17 J1.C20 J1.C21 J1.C24 J1.C25 J1.C28 J1.C29 J1.C32 J1.C33 J1.C36 J1.C38 J1.C40 J1.D2 J1.D3 J1.D6 J1.D7 J1.D10 J1.D13 J1.D16 J1.D19 J1.D22 J1.D25 J1.D28 J1.D35 J1.D37 J1.D39 J1.E1 J1.E4 J1.E5 J1.E8 J1.E11 J1.E14 J1.E17 J1.E20 J1.E23 J1.E26 J1.E29 J1.E32 J1.E35 J1.E38 J1.E40 J1.F2 J1.F3 J1.F6 J1.F9 J1.F12 J1.F15 J1.F18 J1.F21 J1.F24 J1.F27 J1.F30 J1.F33 J1.F36 J1.F39 J2.6 J2.K J3.5 J3.10 J3.15 J4.5 J4.10 J5.5 J5.10 J5.15 J6.5 J6.10 P6.1 P7.2 PS1.3 PS1.7 PS1.8 PS1.9 R16.1 R34.1 R35.1 R36.1 R37.1 R38.1 R39.1 R40.1 R41.1 R42.1 R43.1 U3.1 U4.2 U5.8 U5.9 U5.14 U5.15 U5.16
NetC8_2: C8.2 U4.4
NetD1_A: D1.A R24.1
NetD2_A: D2.A R25.1
NetD3_A: D3.A R26.1
NetD4_A: D4.A R27.1
NetD5_A: D5.A R28.1
NetD6_A: D6.A R29.1
NetD7_A: D7.A R30.1
NetD8_A: D8.A R31.1
NetD9_A: D9.A R32.1
NetD10_A: D10.A R33.1
NetD12_2: D12.2 PS1.4 PS1.5
NetJ1_A2: J1.A2 J3.1 R7.1
NetJ1_A3: J1.A3 J3.2
NetJ1_A6: J1.A6 J3.6 R6.1
NetJ1_A7: J1.A7 J3.7
NetJ1_A10: J1.A10 J3.11 R5.1
NetJ1_A11: J1.A11 J3.12
NetJ1_A14: J1.A14 J5.1 R10.2
NetJ1_A15: J1.A15 J5.2
NetJ1_A18: J1.A18 J5.6 R11.2
NetJ1_A19: J1.A19 J5.7
NetJ1_A22: J1.A22 J3.3
NetJ1_A23: J1.A23 J3.4
NetJ1_A26: J1.A26 J3.8
NetJ1_A27: J1.A27 J3.9
NetJ1_A30: J1.A30 J3.13
NetJ1_A31: J1.A31 J3.14
NetJ1_A34: J1.A34 J5.3
NetJ1_A35: J1.A35 J5.4
NetJ1_A38: J1.A38 J5.8
NetJ1_A39: J1.A39 J5.9
NetJ1_B12: J1.B12 J5.11 R12.2
NetJ1_B13: J1.B13 J5.12
NetJ1_B16: J1.B16 J4.1 R13.2
NetJ1_B17: J1.B17 J4.2
NetJ1_B32: J1.B32 J5.13
NetJ1_B33: J1.B33 J5.14
NetJ1_B36: J1.B36 J4.3
NetJ1_B37: J1.B37 J4.4
NetJ1_C2: J1.C2 J4.8
NetJ1_C3: J1.C3 J4.9
NetJ1_C6: J1.C6 J4.6 R14.2
NetJ1_C7: J1.C7 J4.7
NetJ1_C10: J1.C10 J6.1 R9.1
NetJ1_C11: J1.C11 J6.2
NetJ1_C14: J1.C14 J6.6 R8.1
NetJ1_C15: J1.C15 J6.7
NetJ1_C18: J1.C18 J6.3
NetJ1_C19: J1.C19 J6.4
NetJ1_C22: J1.C22 J6.8
NetJ1_C23: J1.C23 J6.9
NetJ1_C26: J1.C26 P1.2 P2.2 R22.1 U3.6 U5.5
NetJ1_C27: J1.C27 P1.1 P2.1 R23.1 U3.5 U5.3
NetJ1_D8: J1.D8 J2.4 P3.4
NetJ1_D9: J1.D9 P3.3
NetJ1_D11: J1.D11 J2.5 P3.2
NetJ1_D12: J1.D12 J2.3
NetJ1_D14: J1.D14
NetJ1_D15: J1.D15
NetJ1_D17: J1.D17
NetJ1_D18: J1.D18 P3.1
NetJ1_D20: J1.D20 P4.6 R19.1
NetJ1_D21: J1.D21 P4.5
NetJ1_D23: J1.D23 P4.4 R20.1
NetJ1_D24: J1.D24 P4.3
NetJ1_D26: J1.D26 P4.2 R21.1
NetJ1_D27: J1.D27 P4.1
NetJ1_E2: J1.E2 J2.1
NetJ1_E3: J1.E3 J2.2
NetJ1_E6: J1.E6 P5.10
NetJ1_E7: J1.E7 P5.9
NetJ1_E9: J1.E9 P5.8
NetJ1_E10: J1.E10 P5.7
NetJ1_E12: J1.E12 P5.6
NetJ1_E13: J1.E13 P5.5
NetJ1_E15: J1.E15 P5.4
NetJ1_E16: J1.E16 P5.3
NetJ1_E18: J1.E18 P5.2
NetJ1_E19: J1.E19 P5.1
NetJ1_E21: J1.E21 R24.2
NetJ1_E22: J1.E22 R25.2
NetJ1_E24: J1.E24 R26.2
NetJ1_E25: J1.E25 R27.2
NetJ1_E27: J1.E27 R28.2
NetJ1_E28: J1.E28 R29.2
NetJ1_E30: J1.E30 R30.2
NetJ1_E31: J1.E31 R31.2
NetJ1_E33: J1.E33 R32.2
NetJ1_E34: J1.E34 R33.2
NetJ1_E36: J1.E36
NetJ1_E37: J1.E37
NetJ1_F4: J1.F4 R34.2 S1.S
NetJ1_F5: J1.F5 R35.2 S2.S
NetJ1_F7: J1.F7 R36.2 S3.S
NetJ1_F8: J1.F8 R37.2 S4.S
NetJ1_F10: J1.F10 R38.2 S5.S
NetJ1_F11: J1.F11 R39.2 S6.S
NetJ1_F13: J1.F13 R40.2 S7.S
NetJ1_F14: J1.F14 R41.2 S8.S
NetJ1_F16: J1.F16 R42.2 S9.S
NetJ1_F17: J1.F17 R43.2 S10.S
NetJ1_F19: J1.F19 U5.1
NetP6_2: P6.2 R17.2
NetP7_1: P7.1 R18.1
NetPS1_6: PS1.6 R15.2
NetPS1_10: PS1.10 R?.1
NetR1_1: R1.1 U3.7 U3.8
NetR2_1: R2.1 U3.4
NetR3_1: R3.1 U3.3
NetR4_1: R4.1
NetR15_1: R15.1 R16.2
pads on no net: D1.K D2.K D3.K D4.K D5.K D6.K D7.K D8.K D9.K D10.K J1.B1 J1.B4 J1.B5 J1.B8 J1.B9 J1.B20 J1.B21 J1.B24 J1.B25 J1.B28 J1.B29 J1.B40 J1.C30 J1.C31 J1.C34 J1.D1 J1.D4 J1.D5 J1.D29 J1.D30 J1.D31 J1.D33 J1.D34 J1.E39 J1.F1 J1.F20 J1.F22 J1.F23 J1.F25 J1.F26 J1.F28 J1.F29 J1.F31 J1.F32 J1.F34 J1.F35 J1.F37 J1.F38 J1.F40 J1.G1 J1.G2 J1.G3 J1.G4 J1.G5 J1.G6 J1.G7 J1.G8 J1.G9 J1.G10 J1.G11 J1.G12 J1.G13 J1.G14 J1.G15 J1.G16 J1.G17 J1.G18 J1.G19 J1.G20 J1.G21 J1.G22 J1.G23 J1.G24 J1.G25 J1.G26 J1.G27 J1.G28 J1.G29 J1.G30 J1.G31 J1.G32 J1.G33 J1.G34 J1.G35 J1.G36 J1.G37 J1.G38 J1.G39 J1.G40 J1.H1 J1.H2 J1.H3 J1.H4 J1.H5 J1.H6 J1.H7 J1.H8 J1.H9 J1.H10 J1.H11 J1.H12 J1.H13 J1.H14 J1.H15 J1.H16 J1.H17 J1.H18 J1.H19 J1.H20 J1.H21 J1.H22 J1.H23 J1.H24 J1.H25 J1.H26 J1.H27 J1.H28 J1.H29 J1.H30 J1.H31 J1.H32 J1.H33 J1.H34 J1.H35 J1.H36 J1.H37 J1.H38 J1.H39 J1.H40 J1.J1 J1.J2 J1.J3 J1.J4 J1.J5 J1.J6 J1.J7 J1.J8 J1.J9 J1.J10 J1.J11 J1.J12 J1.J13 J1.J14 J1.J15 J1.J16 J1.J17 J1.J18 J1.J19 J1.J20 J1.J21 J1.J22 J1.J23 J1.J24 J1.J25 J1.J26 J1.J27 J1.J28 J1.J29 J1.J30 J1.J31 J1.J32 J1.J33 J1.J34 J1.J35 J1.J36 J1.J37 J1.J38 J1.J39 J1.J40 J1.K1 J1.K2 J1.K3 J1.K4 J1.K5 J1.K6 J1.K7 J1.K8 J1.K9 J1.K10 J1.K11 J1.K12 J1.K13 J1.K14 J1.K15 J1.K16 J1.K17 J1.K18 J1.K19 J1.K20 J1.K21 J1.K22 J1.K23 J1.K24 J1.K25 J1.K26 J1.K27 J1.K28 J1.K29 J1.K30 J1.K31 J1.K32 J1.K33 J1.K34 J1.K35 J1.K36 J1.K37 J1.K38 J1.K39 J1.K40 J1.None J2.8 J2.9 J2.10 J2.A J3.None J4.11 J4.12 J4.13 J4.14 J4.15 J4.None J5.None J6.11 J6.12 J6.13 J6.14 J6.15 J6.None S1.O S2.O S3.O S4.O S5.O S6.O S7.O S8.O S9.O S10.O U5.2 U5.7 U5.10

## Text inside footprints (layer, text, board x,y; h text height)
D1: Mechanical 4 "A" at 15740,2585.16 h73.82 r90; Mechanical 4 "K" at 15740,2385.16 h73.82 r90; Mechanical 4 "A" at 15740,2585.16 h73.82 r90; Mechanical 4 "K" at 15740,2385.16 h73.82 r90
D2: Mechanical 4 "A" at 15090,2585.16 h73.82 r90; Mechanical 4 "K" at 15090,2385.16 h73.82 r90; Mechanical 4 "A" at 15090,2585.16 h73.82 r90; Mechanical 4 "K" at 15090,2385.16 h73.82 r90
D3: Mechanical 4 "A" at 13990,2585.16 h73.82 r90; Mechanical 4 "K" at 13990,2385.16 h73.82 r90; Mechanical 4 "A" at 13990,2585.16 h73.82 r90; Mechanical 4 "K" at 13990,2385.16 h73.82 r90
D4: Mechanical 4 "A" at 12875,2585.16 h73.82 r90; Mechanical 4 "K" at 12875,2385.16 h73.82 r90; Mechanical 4 "A" at 12875,2585.16 h73.82 r90; Mechanical 4 "K" at 12875,2385.16 h73.82 r90
D5: Mechanical 4 "A" at 11990,2585.16 h73.82 r90; Mechanical 4 "K" at 11990,2385.16 h73.82 r90; Mechanical 4 "A" at 11990,2585.16 h73.82 r90; Mechanical 4 "K" at 11990,2385.16 h73.82 r90
D6: Mechanical 4 "A" at 11110,2585.16 h73.82 r90; Mechanical 4 "K" at 11110,2385.16 h73.82 r90; Mechanical 4 "A" at 11110,2585.16 h73.82 r90; Mechanical 4 "K" at 11110,2385.16 h73.82 r90
D7: Mechanical 4 "A" at 10225,2585.16 h73.82 r90; Mechanical 4 "K" at 10225,2385.16 h73.82 r90; Mechanical 4 "A" at 10225,2585.16 h73.82 r90; Mechanical 4 "K" at 10225,2385.16 h73.82 r90
D8: Mechanical 4 "A" at 9340,2585.16 h73.82 r90; Mechanical 4 "K" at 9340,2385.16 h73.82 r90; Mechanical 4 "A" at 9340,2585.16 h73.82 r90; Mechanical 4 "K" at 9340,2385.16 h73.82 r90
D9: Mechanical 4 "A" at 8495,2585.16 h73.82 r90; Mechanical 4 "K" at 8495,2385.16 h73.82 r90; Mechanical 4 "A" at 8495,2585.16 h73.82 r90; Mechanical 4 "K" at 8495,2385.16 h73.82 r90
D10: Mechanical 4 "A" at 7595,2585.16 h73.82 r90; Mechanical 4 "K" at 7595,2385.16 h73.82 r90; Mechanical 4 "A" at 7595,2585.16 h73.82 r90; Mechanical 4 "K" at 7595,2385.16 h73.82 r90
U5: Top Overlay "*" at 7795,1823.61 h31.25; Top Overlay "Y" at 7769,1969 h30; Top Overlay "X" at 7852,1873 h30; Top Overlay "Z" at 7726,1845 h30; Mechanical 1 "*" at 7795,1823.61 h31.25; Mechanical 16 "0.179in/4.547mm" at 7910,1398.5 h15.62; Mechanical 16 "0.301in/7.645mm" at 7694.5,1675 h15.62; Mechanical 16 "0.297in/7.544mm" at 8175.5,1675 h15.62; Mechanical 16 "0.175in/4.445mm" at 7910,2001.5 h15.62; Mechanical 16 "0.034in/0.864mm" at 7980.5,1926.5 h15.62; Mechanical 16 "0.039in/1mm" at 8100.5,1753.74 h15.62; Mechanical 16 "Alt 2 Padstyle: OX90Y60D30P" at 7983,1083.5 h31.25; Mechanical 16 "Alt 1 Padstyle: OX60Y90D30P" at 7983,1143.5 h31.25; Mechanical 16 "Default Padstyle: RX22Y34D0T" at 7910,1312.5 h31.25